# EAGLE board Order (EAGLE 9.5.1)
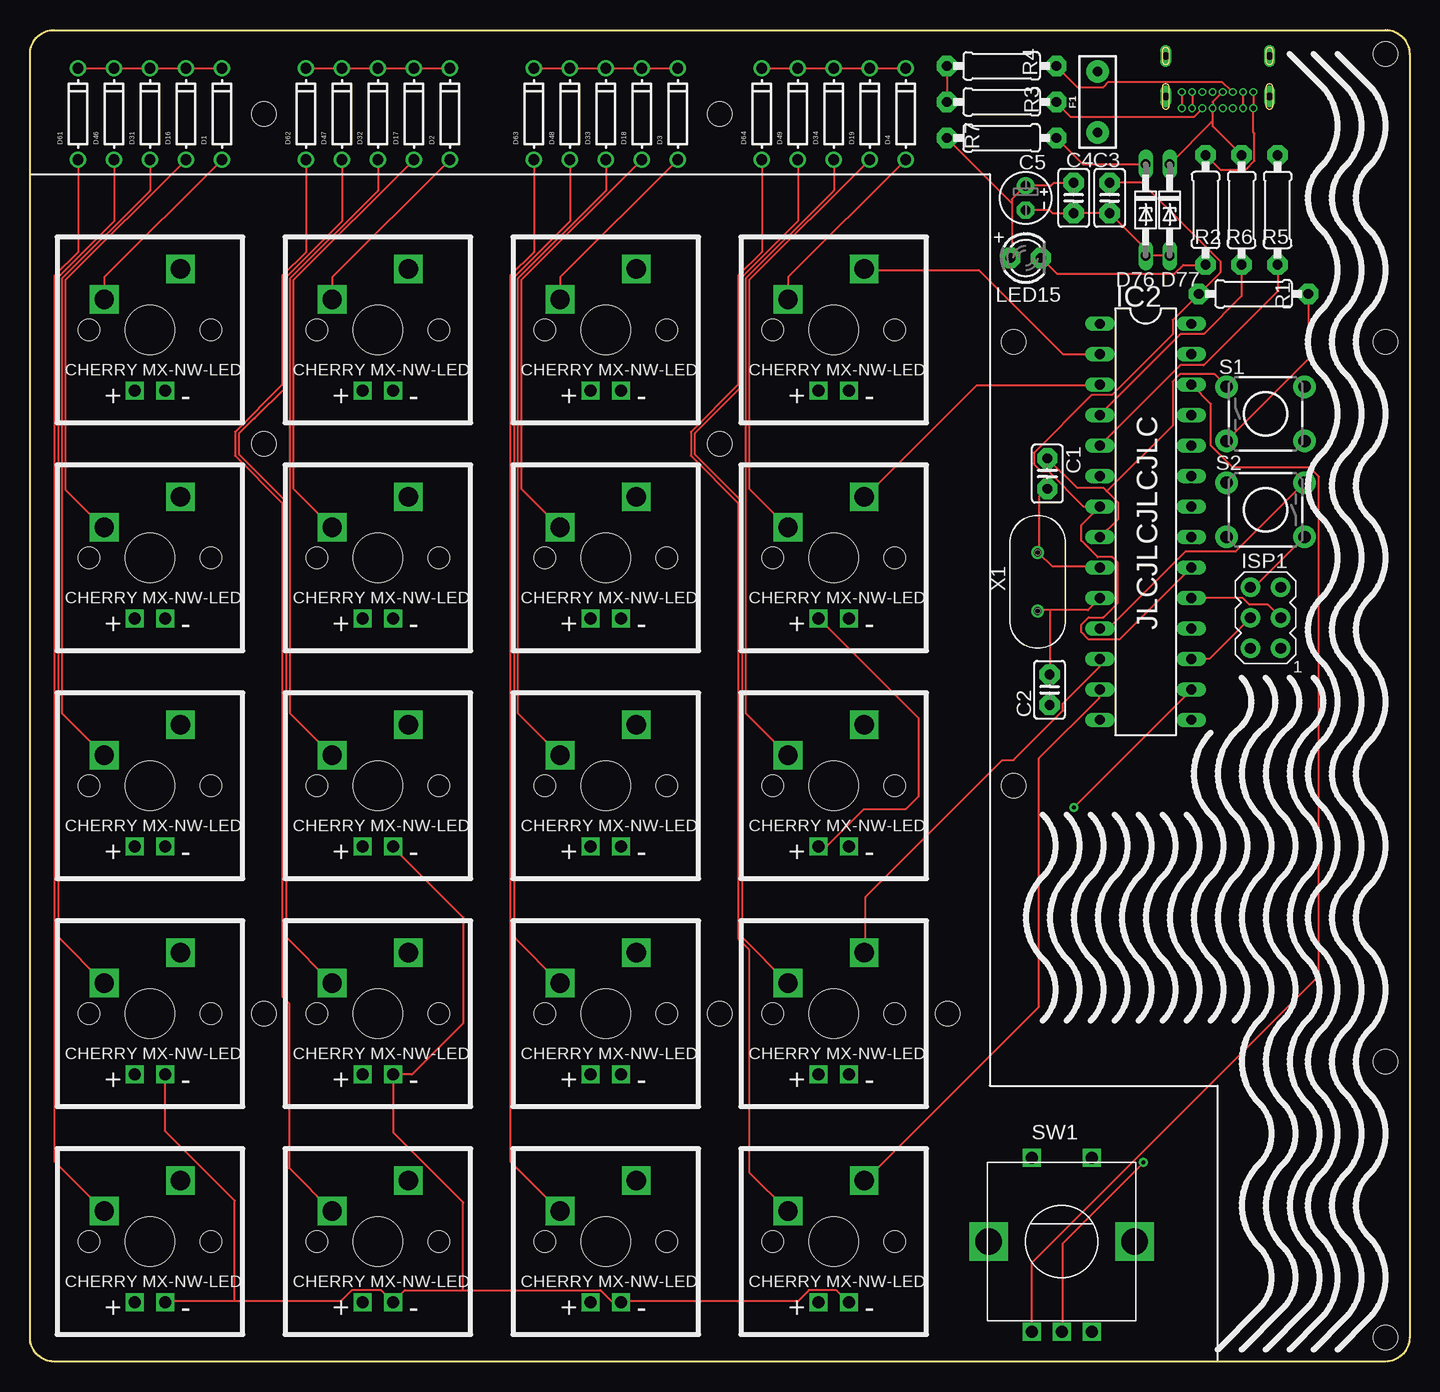
[diagram p0: board, top side]
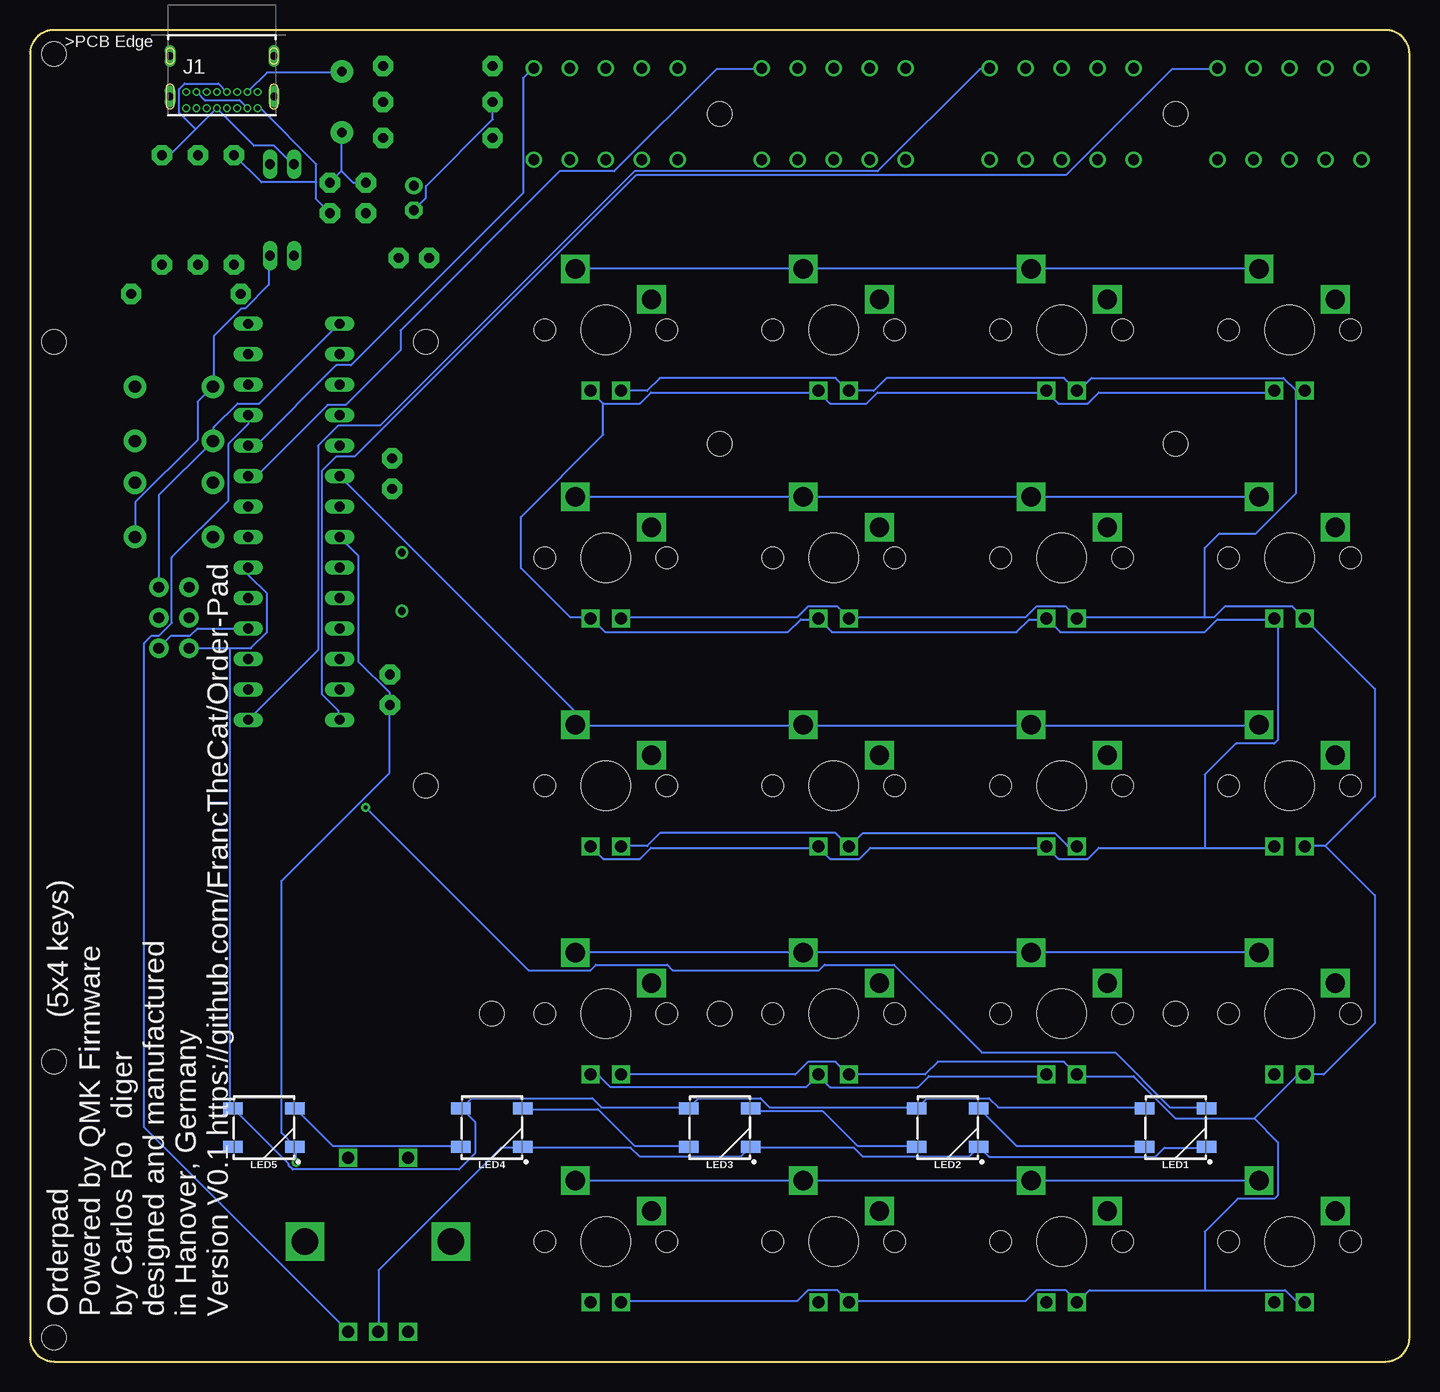
[diagram p1: board, bottom side, seen from below]

Size 115 x 111 mm. Coordinates in mm from the lower left corner, seen from the top.
Outline: 2,0 arc-90 0,2 0,109 arc-90 2,111 113,111 arc-90 115,109 115,2 arc-90 113,0 2,0
Copper layers (1*16): Top 0.035mm / dielectric 1.5mm / Bottom 0.035mm
Design rules "default *": minimum track width 6mil, minimum drill 0.35mm, track to track 6mil, track to pad 6mil, pad to pad 6mil, via to via 6mil, smd to smd 6mil, copper to edge 40mil, drill to drill 6mil, minimum pad ring 0mil, minimum via ring 8mil, stop-mask expansion 4mil, vias tented up to drill 0mil, thermal gap 10mil
Holes 2 mm at 19.5,104 57.5,104 113,109 113,85 113,2 113,25 82,48 82,85 19.5,29 57.5,29 19.5,76.5 57.5,76.5 76.5,29

## Footprints (pad centres in the part's own frame; a part is rotated, then mirrored left to right if it is on the bottom)
C025-025X050 = drill 0.813 pad 1.676 octagon: 1 -1.27,0; 2 1.27,0
E2-4 = drill 0.813 pad 1.422: + -1.016,0 | drill 0.813 pad 1.422 octagon: - 1.016,0
DO-1N4148 = drill 0.9: A -3.81,0; C 3.81,0
DO34Z7 = drill 0.813 long: A 3.81,0; C -3.81,0
PTH = drill 0.8 pad 1.88: P$1 -2.54,0; P$2 2.54,0
DIL28-3 = drill 0.813 long: 1 -16.51,-3.81; 2 -13.97,-3.81; 3 -11.43,-3.81; 4 -8.89,-3.81; 5 -6.35,-3.81; 6 -3.81,-3.81; 7 -1.27,-3.81; 8 1.27,-3.81; 9 3.81,-3.81; 10 6.35,-3.81; 11 8.89,-3.81; 12 11.43,-3.81; 13 13.97,-3.81; 14 16.51,-3.81; 15 16.51,3.81; 16 13.97,3.81; 17 11.43,3.81; 18 8.89,3.81; 19 6.35,3.81; 20 3.81,3.81; 21 1.27,3.81; 22 -1.27,3.81; 23 -3.81,3.81; 24 -6.35,3.81; 25 -8.89,3.81; 26 -11.43,3.81; 27 -13.97,3.81; 28 -16.51,3.81
AVRISP = drill 0.9 pad 1.626: 1 -1.27,2.54; 2 1.27,2.54; 3 -1.27,0; 4 1.27,0; 5 -1.27,-2.54; 6 1.27,-2.54
GCT_USB4085-GF-A_REVA = drill 0.4 pad 0.65: A1 -2.975,4.025; A4 -2.125,4.025; A5 -1.275,4.025; A6 -0.425,4.025; A7 0.425,4.025; A8 1.275,4.025; A9 2.125,4.025; A12 2.975,4.025; B1 2.975,2.675; B4 2.125,2.675; B5 1.275,2.675; B6 0.425,2.675; B7 -0.425,2.675; B8 -1.275,2.675; B9 -2.125,2.675; B12 -2.975,2.675 | drill 0.6 long: P1 -4.325,3.045; P2 4.325,3.045; P3 4.325,-0.335; P4 -4.325,-0.335
WS2812B = smd 1.651 x 1: 1 2.577,-1.6; 2 2.577,1.6; 3 -2.577,1.6; 4 -2.577,-1.6
LED3MM = drill 0.813 pad 1.676 octagon: A -1.27,0; K 1.27,0
0207/9 = drill 0.813 pad 1.676 octagon: 1 -4.572,0; 2 4.572,0
TACTILE-PTH = drill 1.016 pad 1.88: 1 -3.251,2.261; 2 3.251,2.261; 3 -3.251,-2.261; 4 3.251,-2.261
ALPS_EC12E_SW = drill 1 square: A -2.5,-7.5; B 2.5,-7.5; C 0,-7.5; D -2.5,7; E 2.5,7 | drill 2.2 square: GND1 -6.1,0; GND2 6.1,0
CHERRYMX-NN-LED = drill 1 square: LED+ -1.27,-5.08; LED- 1.27,-5.08 | drill 1.6 square: SIDE -3.81,2.54; UP 2.54,5.08 | hole 1.753: -5.08,0; 5.08,0 | hole 4.089: 0,0
XTAL_HC49 = drill 0.65 pad 1.05: 1 -2.44,0; 2 2.44,0

## Placement (x,y rotation side)
C1  22p  [C025-025X050]  84.81,74.02 270 top
C2  22p  [C025-025X050]  85,56 90 top
C3  0.1u  [C025-025X050]  90,97 270 top
C4  0.1u  [C025-025X050]  87,97 270 top
C5  4.7u  [E2-4]  83,97 270 top
D1  [DO-1N4148]  16,104 90 top
D2  [DO-1N4148]  35,104 90 top
D3  [DO-1N4148]  54,104 90 top
D4  [DO-1N4148]  73,104 90 top
D16  [DO-1N4148]  13,104 90 top
D17  [DO-1N4148]  32,104 90 top
D18  [DO-1N4148]  51,104 90 top
D19  [DO-1N4148]  70,104 90 top
D31  [DO-1N4148]  10,104 90 top
D32  [DO-1N4148]  29,104 90 top
D33  [DO-1N4148]  48,104 90 top
D34  [DO-1N4148]  67,104 90 top
D46  [DO-1N4148]  7,104 90 top
D47  [DO-1N4148]  26,104 90 top
D48  [DO-1N4148]  45,104 90 top
D49  [DO-1N4148]  64,104 90 top
D61  [DO-1N4148]  4,104 90 top
D62  [DO-1N4148]  23,104 90 top
D63  [DO-1N4148]  42,104 90 top
D64  [DO-1N4148]  61,104 90 top
D76  [DO34Z7]  93,96 270 top
D77  [DO34Z7]  95,96 270 top
F1  72V/0.25A  [PTH]  89,105 90 top
IC2  ATMEGA328P  [DIL28-3]  93,70 270 top
ISP1  AVRISP-6  [AVRISP]  103,62 180 top
J1  USB4085-GF-A_REVA  [GCT_USB4085-GF-A_REVA]  99,108.5 180 bottom
LED1  WS2812B  [WS2812B]  19.5,19.5 180 bottom
LED2  WS2812B  [WS2812B]  38.5,19.5 180 bottom
LED3  WS2812B  [WS2812B]  57.5,19.5 180 bottom
LED4  WS2812B  [WS2812B]  76.5,19.5 180 bottom
LED5  WS2812B  [WS2812B]  95.5,19.5 180 bottom
LED15  [LED3MM]  83,92 0 top
R1  10k  [0207/9]  102,89 180 top
R2  1.5k  [0207/9]  98,96 90 top
R3  5.1k  [0207/9]  81,105 180 top
R4  5.1k  [0207/9]  81,108 180 top
R5  75R  [0207/9]  104,96 270 top
R6  75R  [0207/9]  101,96 270 top
R7  1.5k  [0207/9]  81,102 180 top
S1  [TACTILE-PTH]  103,79 0 top
S2  [TACTILE-PTH]  103,71 180 top
SW1  EC12E_SW  [ALPS_EC12E_SW]  86,10 0 top
U$1  CHERRY-MX1A-E1NW-LED  [CHERRYMX-NN-LED]  10,86 0 top
U$2  CHERRY-MX1A-E1NW-LED  [CHERRYMX-NN-LED]  29,86 0 top
U$3  CHERRY-MX1A-E1NW-LED  [CHERRYMX-NN-LED]  48,86 0 top
U$4  CHERRY-MX1A-E1NW-LED  [CHERRYMX-NN-LED]  67,86 0 top
U$16  CHERRY-MX1A-E1NW-LED  [CHERRYMX-NN-LED]  10,67 0 top
U$17  CHERRY-MX1A-E1NW-LED  [CHERRYMX-NN-LED]  29,67 0 top
U$18  CHERRY-MX1A-E1NW-LED  [CHERRYMX-NN-LED]  48,67 0 top
U$19  CHERRY-MX1A-E1NW-LED  [CHERRYMX-NN-LED]  67,67 0 top
U$31  CHERRY-MX1A-E1NW-LED  [CHERRYMX-NN-LED]  10,48 0 top
U$32  CHERRY-MX1A-E1NW-LED  [CHERRYMX-NN-LED]  29,48 0 top
U$33  CHERRY-MX1A-E1NW-LED  [CHERRYMX-NN-LED]  48,48 0 top
U$34  CHERRY-MX1A-E1NW-LED  [CHERRYMX-NN-LED]  67,48 0 top
U$46  CHERRY-MX1A-E1NW-LED  [CHERRYMX-NN-LED]  10,29 0 top
U$47  CHERRY-MX1A-E1NW-LED  [CHERRYMX-NN-LED]  29,29 0 top
U$48  CHERRY-MX1A-E1NW-LED  [CHERRYMX-NN-LED]  48,29 0 top
U$49  CHERRY-MX1A-E1NW-LED  [CHERRYMX-NN-LED]  67,29 0 top
U$61  CHERRY-MX1A-E1NW-LED  [CHERRYMX-NN-LED]  10,10 0 top
U$62  CHERRY-MX1A-E1NW-LED  [CHERRYMX-NN-LED]  29,10 0 top
U$63  CHERRY-MX1A-E1NW-LED  [CHERRYMX-NN-LED]  48,10 0 top
U$64  CHERRY-MX1A-E1NW-LED  [CHERRYMX-NN-LED]  67,10 0 top
X1  49S/18PF  [XTAL_HC49]  84,65 90 top

## Library data of the parts
C1-C5 D1-D4 D16-D19 D31-D34 D46-D49 D61-D64 IC2 ISP1 LED15 R1-R7 = adafruit
D76 D77 = diode
F1 = SparkFun-Fuses; PROD_ID: RES-08490
J1 = USB4085-GF-A_REVA; DESCRIPTION: CONN RCPT USB2.0 TYPEC 16POS; DIGI-KEY_PART_NUMBER: 2073-USB4085-GF-ACT-ND; DIGI-KEY_PURCHASE_URL: https://www.digikey.de/product-detail/en/gct/USB4085-GF-A/2073-USB4085-GF-ACT-ND/9859733?utm_source=snapeda&utm_medium=aggregator&utm_campaign=symbol; MF: Global Connector Technology; MP: USB4085-GF-A; PACKAGE: Package Analog Devices
LED1-LED5 = SparkFun-LED; PROD_ID: DIO-12503
S1 S2 = SparkFun-Retired
SW1 = switch-alps; MPN: EC12E2424407; OC_FARNELL: 1520813; OC_NEWARK: 74M1068
U$1-U$4 U$16-U$19 U$31-U$34 U$46-U$49 U$61-U$64 = my_parts
X1 = Crystals; CREATED_BY: PCBLayout.com; MANUFACTURER: Xinhunjing; MPN: 49S/18PF; PACKAGE: SMD

## Nets
5V: C3.1 C4.1 C5.+ F1.P$1 IC2.7 IC2.20 ISP1.2 LED1.1 LED2.1 LED3.1 LED4.1 LED5.1 LED15.A R1.2 R7.2
BOOT: IC2.11 S2.3
COLUMN0: D1.C D16.C D31.C D46.C D61.C IC2.14
COLUMN1: D2.C D17.C D32.C D47.C D62.C IC2.15
COLUMN2: D3.C D18.C D33.C D48.C D63.C IC2.23
COLUMN3: D4.C D19.C D34.C D49.C D64.C IC2.24
ENCODER_A: IC2.26 SW1.A
ENCODER_B: IC2.25 SW1.B
GND: C1.1 C2.1 C3.2 C4.2 C5.- D76.A D77.A IC2.8 ISP1.6 J1.A1 J1.A12 J1.B1 J1.B12 LED1.3 LED2.3 LED3.3 LED4.3 LED5.3 R2.2 R3.2 R4.2 S1.1 S2.1 SW1.C
LED+: U$1.LED+ U$2.LED+ U$3.LED+ U$4.LED+ U$16.LED+ U$17.LED+ U$18.LED+ U$19.LED+ U$31.LED+ U$32.LED+ U$33.LED+ U$34.LED+ U$46.LED+ U$47.LED+ U$48.LED+ U$49.LED+ U$61.LED+ U$62.LED+ U$63.LED+ U$64.LED+
LED-: U$1.LED- U$2.LED- U$3.LED- U$4.LED- U$16.LED- U$17.LED- U$18.LED- U$19.LED- U$31.LED- U$32.LED- U$33.LED- U$34.LED- U$46.LED- U$47.LED- U$48.LED- U$49.LED- U$61.LED- U$62.LED- U$63.LED- U$64.LED-
MISO: IC2.18 ISP1.1
MOSI: IC2.17 ISP1.4
N$1: D1.A U$1.SIDE
N$2: D2.A U$2.SIDE
N$3: D3.A U$3.SIDE
N$4: D4.A U$4.SIDE
N$5: LED4.2 LED5.4
N$16: D16.A U$16.SIDE
N$17: D17.A U$17.SIDE
N$18: D18.A U$18.SIDE
N$19: D19.A U$19.SIDE
N$31: D31.A U$31.SIDE
N$32: D32.A U$32.SIDE
N$33: D33.A U$33.SIDE
N$34: D34.A U$34.SIDE
N$41: LED1.2 LED2.4
N$42: LED2.2 LED3.4
N$43: C1.2 IC2.9 X1.2
N$44: C2.2 IC2.10 X1.1
N$45: LED15.K R2.1
N$46: LED3.2 LED4.4
N$59: D46.A U$46.SIDE
N$60: D47.A U$47.SIDE
N$61: D48.A U$48.SIDE
N$62: D49.A U$49.SIDE
N$74: D61.A U$61.SIDE
N$75: D62.A U$62.SIDE
N$76: D63.A U$63.SIDE
N$77: D64.A U$64.SIDE
N$93: F1.P$2 J1.A4 J1.A9 J1.B4 J1.B9
N$95: J1.A5 R3.1
N$96: D76.C J1.A7 J1.B7 R5.1 R7.1
N$97: D77.C J1.A6 J1.B6 R6.1
N$98: J1.B5 R4.1
RESET: IC2.1 ISP1.5 R1.1 S1.3
RGB_DATA: IC2.16 LED1.4
ROW0: IC2.2 U$1.UP U$2.UP U$3.UP U$4.UP
ROW1: IC2.3 U$16.UP U$17.UP U$18.UP U$19.UP
ROW2: IC2.6 U$31.UP U$32.UP U$33.UP U$34.UP
ROW3: IC2.12 U$46.UP U$47.UP U$48.UP U$49.UP
ROW4: IC2.13 U$61.UP U$62.UP U$63.UP U$64.UP
SCK: IC2.19 ISP1.3
USB_D+: IC2.4 R6.2
USB_D-: IC2.5 R5.2

## Tracks (layer width: path | path; a pad name or v marks a point on that pad's centre or on a via)
5V
  Top 0.152: IC2.20 96.77,66.14 90.83,60.2 88.24,60.2 87.63,60.81 87.63,61.42 88.24,62.03 89.46,62.03 90.68,63.25 90.68,66.6 90.22,67.06 89,67.06 87.63,68.43 87.63,69.72 89.18,71.27 IC2.7 87.83,71.27 84.89,74.22 84.28,74.22 83.67,74.83 83.67,75.74 88.49,80.57 90.17,80.57 95.25,85.65 95.25,86.82 R1.2 99.21,90.78 99.21,91.75 92.69,98.27 C3.1 | C4.1 85.37,98.27 85.1,98.02 C5.+ 82.97,98.01 81.84,96.88 81.84,96.57 | 81.84,96.57 81.84,92.05 LED15.A | 81.84,96.57 76.43,101.98 R7.2
  Bottom 0.152: 98.3,59.46 ISP1.2 | 98.3,59.46 96.6,59.46 95.25,60.81 95.25,64.01 96.77,65.53 96.77,66.14 IC2.20 | 89,99.26 89,99.21 88.06,98.27 C4.1 | 89,99.26 89,102.41 F1.P$1 | 89,99.26 C3.1 | LED1.1 22.1,21.18 34.29,21.18 35.05,21.95 40.23,21.95 41,21.18 LED2.1 41.15,21.18 53.34,21.18 54.1,21.95 59.28,21.95 60.05,21.18 LED3.1 60.2,21.18 67.36,21.18 68.12,21.95 78.18,21.95 78.94,21.18 LED4.1 78.94,21.03 77.88,19.96 77.88,17.37 79.25,16 93.12,16 93.42,16.31 93.42,16.46 97.99,21.03 LED5.1 98.15,21.18 98.3,21.34 98.3,59.46
BOOT
  Top 0.152: S2.3 106.23,73.26 100.48,67.51 96.32,67.51 89.92,61.11 89.31,61.11 IC2.11
COLUMN0
  Top 0.152: D61.C D46.C | D46.C | D46.C D31.C | D31.C 10.06,107.81 | 10.06,107.81 12.95,107.81 | 12.95,107.81 D16.C | D16.C D1.C | D46.C 7.01,107.75 D46.C | D31.C 10.06,107.75 10.06,107.81 | D16.C 12.95,107.75 12.95,107.81
  Bottom 0.152: IC2.14 89.31,53.49 89.31,54.25 90.68,55.63 90.68,74.22 89.46,75.44 87.94,75.44 64.47,98.91 28.65,98.91 19.81,107.75 16,107.75 D1.C
COLUMN1
  Top 0.152: D62.C D47.C | D47.C 26.06,107.81 | 26.06,107.81 28.96,107.81 | 28.96,107.81 D32.C | D32.C D17.C | D17.C | D17.C D2.C | D47.C 26.06,107.75 26.06,107.81 | D32.C 28.96,107.75 28.96,107.81 | D17.C 32,107.75 D17.C
  Bottom 0.152: IC2.15 90.98,59.31 90.98,76.35 89.31,78.03 85.8,78.03 64.62,99.21 44.35,99.21 35.81,107.75 35.05,107.75 D2.C
COLUMN2
  Top 0.152: D63.C 44.96,107.81 | 44.96,107.81 D48.C | D48.C D33.C | D33.C | D33.C D18.C | D18.C 51.05,107.81 | 51.05,107.81 D3.C | D48.C 44.96,107.75 44.96,107.81 | D33.C 48.01,107.75 D33.C | D18.C 51.05,107.75 51.05,107.81
  Bottom 0.152: IC2.23 96.77,73.91 96.01,73.91 90.19,79.73 88.7,79.73 84.12,84.3 84.12,85.95 70.87,99.21 66.29,99.21 57.76,107.75 54.1,107.75 D3.C
COLUMN3
  Top 0.152: D64.C D49.C | D49.C | D49.C D34.C | D34.C 67.06,107.81 | 67.06,107.81 69.95,107.81 | 69.95,107.81 D19.C | D19.C D4.C | D49.C 64.01,107.75 D49.C | D34.C 67.06,107.75 67.06,107.81 | D19.C 69.95,107.75 69.95,107.81
  Bottom 0.152: IC2.24 96.77,76.35 96.16,76.35 89.46,83.06 88.24,83.06 73.91,97.38 73.91,106.98 73.15,107.75 D4.C
ENCODER_A
  Top 0.152: IC2.26 96.85,81.43 98.45,79.83 98.45,76.35 100.28,74.52 106.68,74.52 107.44,73.76 107.44,32.16 83.52,8.23 83.52,2.59 SW1.A
ENCODER_B
  Bottom 0.152: IC2.25 96.8,78.16 98.45,76.5 98.45,71.78 103.17,67.06 103.17,61.57 104.24,60.5 104.85,60.5 105.46,59.89 105.46,19.51 88.54,2.59 SW1.B
GND  (via drill 0.35)
  Top 0.152: IC2.8 89.2,68.73 90.68,70.21 90.68,71.63 89.76,72.54 | 89.76,72.54 89.46,72.85 87.27,72.85 84.83,75.29 C1.1 | R3.2 R4.2 | C5.- 84.93,95.98 84.93,95.99 84.99,95.99 85.25,95.73 C4.2 C3.2 90.03,95.72 92.96,92.79 92.96,92.2 D76.A 93.12,92.2 94.94,92.2 D77.A | ISP1.6 102.03,64.54 106.22,68.73 S2.1 | J1.B1 J1.A12 101.97,102.46 102.08,102.39 102.08,100.1 101.35,99.36 99.21,99.36 98.15,100.43 R2.2 | J1.B12 96.04,105.81 96.04,104.49 J1.A1 | 89.76,72.54 95.25,78.03 95.25,81.69 95.86,82.3 98.75,82.3 99.67,81.38 S1.1 | v92.81,16.61 92.81,16.56 86.11,9.86 86.11,2.59 SW1.C
  Bottom 0.152: IC2.8 89.18,68.73 87.63,67.18 87.63,58.37 85.04,55.78 85.04,54.86 C2.1 85.04,54.71 85.04,49.07 94.03,40.08 94.03,19.05 92.96,17.98 LED5.3 92.81,17.83 v92.81,16.61 | C5.- 83,95.99 81.99,97 81.99,97.99 76.43,103.56 R3.2 | 91.14,98.3 91.14,96.88 90.01,95.75 C3.2 | 91.14,98.3 91.14,99.82 95.78,104.47 J1.A1 | D77.A 95.1,92.05 95.1,89.76 97.08,87.78 97.38,87.78 99.67,85.5 99.67,81.38 S1.1 99.82,81.23 101.04,80.01 101.04,76.81 106.22,71.63 106.22,68.89 S2.1 | R2.2 97.99,100.58 95.71,98.3 91.14,98.3 | LED1.3 17.07,17.83 20.42,17.83 21.18,17.07 35.05,17.07 35.81,17.83 LED2.3 35.97,17.83 36.73,17.07 45.57,17.07 46.33,17.83 54.86,17.83 LED3.3 55.02,17.83 55.78,17.07 64.16,17.07 64.92,17.83 73.91,17.83 LED4.3 74.07,17.83 75.74,17.83 85.95,7.62 85.95,2.59 SW1.C
LED+
  Top 0.152: U$34.LED+ 65.84,42.98 66.45,42.98 69.49,46.02 73,46.02 74.07,47.09 74.07,53.65 65.84,61.87 U$19.LED+
  Bottom 0.152: 17.07,5.94 26.67,5.94 27.58,5.03 U$62.LED+ 27.74,5.03 28.65,5.94 31.09,5.94 32,5.03 46.63,5.03 U$63.LED+ 46.79,5.03 47.7,5.94 50.14,5.94 51.05,5.03 65.68,5.03 U$64.LED+ | 17.07,5.94 10.36,5.94 9.45,5.03 8.84,5.03 U$61.LED+ | 12.95,20.27 9.45,23.77 8.84,23.77 U$46.LED+ 8.69,23.93 7.16,23.93 2.9,28.19 2.9,38.86 7.01,42.98 | 12.95,20.27 19.51,20.27 23.01,23.77 27.58,23.77 U$47.LED+ 28.8,24.99 39.32,24.99 40.39,23.93 46.63,23.93 U$48.LED+ 46.79,23.93 47.85,24.99 50.14,24.99 51.21,23.93 65.68,23.93 U$49.LED+ | 17.07,5.94 17.07,10.82 14.33,13.56 11.28,13.56 10.97,13.87 10.97,18.29 12.95,20.27 | 9.45,80.92 8.84,80.92 U$1.LED+ 9.45,80.92 | 9.45,80.92 10.52,81.99 26.52,81.99 27.58,80.92 U$2.LED+ 28.8,81.99 43.59,81.99 44.65,80.92 46.63,80.92 U$3.LED+ 46.79,80.92 47.85,81.99 62.48,81.99 63.55,80.92 65.68,80.92 U$4.LED+ | U$32.LED+ 27.74,42.98 28.5,42.98 29.57,44.04 45.57,44.04 46.63,42.98 U$33.LED+ 47.85,44.04 62.48,44.04 63.55,42.98 65.68,42.98 U$34.LED+ | 7.01,42.98 8.69,42.98 U$31.LED+ | 7.01,42.98 2.9,47.09 2.9,56.08 8.69,61.87 U$16.LED+ 8.84,62.03 9.75,62.94 15.39,62.94 16.31,62.03 17.07,62.03 | 17.07,62.03 27.58,62.03 U$17.LED+ 27.74,62.03 28.65,62.94 31.09,62.94 32,62.03 46.63,62.03 U$18.LED+ 46.79,62.03 47.7,62.94 50.14,62.94 51.05,62.03 65.68,62.03 U$19.LED+ | 9.45,80.92 9.45,72.39 12.8,69.04 15.85,69.04 17.07,67.82 17.07,62.03
LED-
  Top 0.152: U$64.LED- 68.12,5.03 67.21,5.94 64.92,5.94 64.01,5.03 49.38,5.03 U$63.LED- 49.23,5.03 48.46,5.03 47.55,5.94 36.12,5.94 | 17.07,5.03 25.91,5.03 26.82,5.94 29.26,5.94 30.18,5.03 U$62.LED- 30.33,5.03 31.24,5.94 36.12,5.94 | 17.07,5.03 11.28,5.03 U$61.LED- | 17.07,5.03 17.07,13.41 11.28,19.2 11.28,23.77 U$46.LED- | 36.12,5.94 36.12,13.26 30.33,19.05 30.33,23.77 U$47.LED- 30.33,23.93 31.85,23.93 36.12,28.19 36.12,37.03 30.33,42.82 U$32.LED-
  Bottom 0.152: U$47.LED- 30.33,23.77 40.08,23.77 41,22.86 48.31,22.86 49.23,23.77 U$48.LED- 49.38,23.77 50.29,22.86 66.6,22.86 67.51,23.77 68.12,23.77 U$49.LED- | U$1.LED- 11.28,80.77 25.91,80.77 26.82,79.86 29.26,79.86 30.18,80.77 U$2.LED- 30.33,80.77 44.35,80.77 45.26,79.86 48.31,79.86 49.23,80.77 U$3.LED- 49.38,80.77 63.25,80.77 64.16,79.86 67.21,79.86 | 67.21,79.86 68.12,80.77 U$4.LED- | 17.07,42.82 25.91,42.82 26.82,41.91 29.26,41.91 30.18,42.82 U$32.LED- 30.33,42.82 44.96,42.82 45.87,41.91 48.31,41.91 49.23,42.82 U$33.LED- 49.38,42.82 63.25,42.82 64.16,41.91 67.21,41.91 68.12,42.82 U$34.LED- | 17.07,42.82 11.28,42.82 U$31.LED- | 17.07,42.82 17.07,48.92 14.48,51.51 11.28,51.51 10.97,51.82 10.97,61.72 11.12,61.87 U$16.LED- 11.28,61.87 16,61.87 17.07,60.81 29.11,60.81 30.18,61.87 U$17.LED- 30.33,61.87 31.7,61.87 32.77,60.81 48.16,60.81 49.23,61.87 U$18.LED- 49.38,61.87 50.75,61.87 51.82,60.81 67.06,60.81 68.12,61.87 U$19.LED- 68.28,62.03 69.95,62.03 74.07,66.14 74.07,70.41 67.21,77.27 67.21,79.86
MISO
  Bottom 0.152: IC2.18 101.04,61.11 101.65,60.5 103.23,60.5 ISP1.1
MOSI
  Top 0.152: ISP1.4 98.3,58.57 IC2.17
N$1
  Top 0.152: D1.A 6.19,90.38 U$1.SIDE
N$2
  Top 0.152: D2.A 25.19,90.38 U$2.SIDE
N$3
  Top 0.152: D3.A 44.19,90.38 U$3.SIDE
N$4
  Top 0.152: D4.A 63.19,90.38 U$4.SIDE
N$5
  Bottom 0.152: LED4.2 79.1,17.98 89.76,17.98 92.81,21.03 LED5.4
N$16
  Top 0.152: U$16.SIDE 6.1,69.54 2.95,72.69 2.95,90.14 D16.A
N$17
  Top 0.152: U$17.SIDE 21.95,72.78 21.95,90.14 D17.A
N$18
  Top 0.152: U$18.SIDE 40.95,72.78 40.95,90.14 D18.A
N$19
  Top 0.152: U$19.SIDE 59.95,72.78 59.95,90.14 D19.A
N$31
  Top 0.152: D31.A 10,97.62 2.65,90.27 2.65,54.08 U$31.SIDE
N$32
  Top 0.152: D32.A 29,97.62 21.65,90.27 21.65,54.08 U$32.SIDE
N$33
  Top 0.152: D33.A 48,97.62 40.65,90.27 40.65,54.08 U$33.SIDE
N$34
  Top 0.152: D34.A 67,97.62 59.65,90.27 59.65,54.08 U$34.SIDE
N$41
  Bottom 0.152: LED1.2 22.1,17.98 32.77,17.98 35.81,21.03 LED2.4
N$42
  Bottom 0.152: LED2.2 41.15,17.98 46.02,17.98 48.92,20.88 54.71,20.88 54.86,21.03 LED3.4
N$43
  Top 0.152: C1.2 84.73,72.69 84.12,72.08 84.12,67.51 X1.2 84.12,67.36 85.19,66.29 89.15,66.29 IC2.9
N$44
  Top 0.152: 85.04,62.64 88.19,62.64 89.18,63.63 IC2.10 | 85.04,62.64 84.12,62.64 X1.1 | 85.04,62.64 85.04,57.3 C2.2
N$45
  Top 0.152: LED15.K 84.3,92 85.62,90.68 95.4,90.68 96.14,91.42 98,91.42 R2.1
N$46
  Bottom 0.152: LED3.2 60.2,17.98 64.62,17.98 67.67,21.03 73.91,21.03 LED4.4
N$59
  Top 0.152: D46.A 7,95.05 2.34,90.39 2.34,35.39 U$46.SIDE
N$60
  Top 0.152: D47.A 26,95.05 21.34,90.39 21.34,81.23 18.7,78.59 18.63,78.59 17.41,77.37 17.41,75.63 21.34,71.7 21.34,35.39 U$47.SIDE
N$61
  Top 0.152: D48.A 45,95.05 40.34,90.39 40.34,35.39 U$48.SIDE
N$62
  Top 0.152: D49.A 64,95.05 59.34,90.39 59.34,81.3 55.41,77.37 55.41,75.63 59.34,71.7 59.34,35.39 U$49.SIDE
N$74
  Top 0.152: D61.A 4,92.48 2.04,90.52 2.04,16.69 U$61.SIDE
N$75
  Top 0.152: D62.A 23,92.48 21.04,90.52 21.04,81.43 17.1,77.49 17.1,75.51 21.04,71.57 21.04,30.42 21.59,29.87 21.59,16.14 U$62.SIDE
N$76
  Top 0.152: D63.A 42,92.48 40.04,90.52 40.04,16.69 U$63.SIDE
N$77
  Top 0.152: D64.A 61,92.48 59.04,90.52 59.04,81.43 55.1,77.49 55.1,75.51 59.04,71.57 59.04,35.26 59.95,34.35 59.95,15.79 U$64.SIDE
N$93
  Top 0.152: J1.A4 J1.B9 | J1.B4 101.12,105.82 101.12,104.48 J1.A9
  Bottom 0.152: J1.A4 96.93,104.55 97.54,105.16 100.43,105.16 101.04,105.77 J1.B4 | J1.B9 96.77,105.92 95.25,107.44 89,107.44 F1.P$2
N$95
  Top 0.152: J1.A5 97.69,104.39 97.08,103.78 86.72,103.78 85.65,104.85 R3.1
N$96
  Top 0.152: D76.C 92.96,99.82 87.78,99.82 85.65,101.96 R7.1
  Bottom 0.152: 101.19,102.72 103.33,100.58 103.94,100.58 R5.1 | 101.19,102.72 99.52,104.39 J1.A7 99.36,104.39 96.32,101.35 94.64,101.35 93.12,99.82 D76.C | J1.B7 99.29,106.53 102.11,106.53 102.56,106.07 102.56,104.09 101.19,102.72
N$97
  Top 0.152: J1.B6 99.36,105.77 98.6,105 98.6,104.55 J1.A6 98.6,104.39 98.6,103.43 | 98.6,103.43 98.6,102.97 R6.1 | D77.C 95,99.83 98.6,103.43
N$98
  Top 0.152: J1.B5 100.13,105.92 99.36,106.68 89.92,106.68 89.46,106.22 87.33,106.22 85.65,107.9 R4.1
RESET
  Top 0.152: R1.1 106.58,83.57 99.82,76.81 S1.3
  Bottom 0.152: IC2.1 89.6,86.16 89.61,86.16 95.91,79.86 97.69,79.86 99.67,77.88 99.67,76.81 S1.3 99.82,76.66 104.27,72.21 ISP1.5
RGB_DATA  (via drill 0.35)
  Top 0.152: v87.02,46.18 96.77,55.93 IC2.16
  Bottom 0.152: v87.02,46.18 73.46,32.61 68.28,32.61 67.82,33.07 61.87,33.07 61.42,32.61 49.23,32.61 48.77,33.07 42.98,33.07 35.66,25.76 24.54,25.76 19.96,21.18 17.07,21.18 LED1.4
ROW0
  Top 0.152: IC2.2 89.15,83.97 86.11,83.97 79.1,90.98 69.65,90.98 U$4.UP
  Bottom 0.152: U$1.UP 12.65,91.14 31.39,91.14 U$2.UP 31.55,91.14 50.44,91.14 U$3.UP 50.6,91.14 69.49,91.14 U$4.UP
ROW1
  Top 0.152: IC2.3 89.15,81.38 78.94,81.38 69.65,72.08 U$19.UP
  Bottom 0.152: U$16.UP 12.65,72.08 31.39,72.08 U$17.UP 50.44,72.08 U$18.UP 50.6,72.08 69.49,72.08 U$19.UP
ROW2
  Bottom 0.152: U$31.UP 12.65,53.03 31.39,53.03 U$32.UP 31.55,53.03 50.44,53.03 U$33.UP 50.6,53.03 69.49,53.03 U$34.UP 69.65,53.19 69.65,54.25 89.15,73.76 IC2.6
ROW3
  Top 0.152: IC2.12 89.15,58.52 89.15,57.91 86.11,54.86 86.11,54.25 81.99,50.14 81.08,50.14 69.65,38.71 69.65,34.14 U$49.UP
  Bottom 0.152: U$46.UP 12.65,34.14 31.39,34.14 U$47.UP 31.55,34.14 50.44,34.14 U$48.UP 50.6,34.14 69.49,34.14 U$49.UP
ROW4
  Top 0.152: IC2.13 89.15,55.93 89.15,55.32 84.12,50.29 84.12,29.57 69.65,15.09 U$64.UP
  Bottom 0.152: U$61.UP 12.65,15.09 31.39,15.09 U$62.UP 50.44,15.09 U$63.UP 50.6,15.09 69.49,15.09 U$64.UP
SCK
  Top 0.152: IC2.19 101.09,63.65 101.65,63.09 103.17,63.09 104.24,62.03 ISP1.3
USB_D+
  Top 0.152: IC2.4 89.19,78.93 95.91,85.65 97.84,85.65 100.99,88.8 100.99,91.42 R6.2
USB_D-
  Top 0.152: IC2.5 89.19,76.36 95.89,83.06 97.84,83.06 104.01,89.23 104.01,91.42 R5.2

## Text on the board
tNames: JLCJLCJLCJLC | Order (5x15 keys) / Powered by QMK Firmware / by Carlos Rödiger / designed and manufactured / in Hanover, Germany / Version V0.1 / https://github.com/FrancTheCat/Order
bNames: Orderpad (5x4 keys) / Powered by QMK Firmware / by Carlos Rödiger / designed and manufactured / in Hanover, Germany / Version V0.1 https://github.com/FrancTheCat/Order-Pad